# Altium PCB Layout_Power_Supply_V1.PcbDoc
Units mm, origin at the board's own origin, x right, y up, seen from the top; angles counter-clockwise.
Board outline 39.75 x 37.34 mm, 2 copper layers (Top Layer, Bottom Layer); 41 components, 27 nets, 113 pads, 26 vias.
Unrouted connection lines stored in the file: 1.
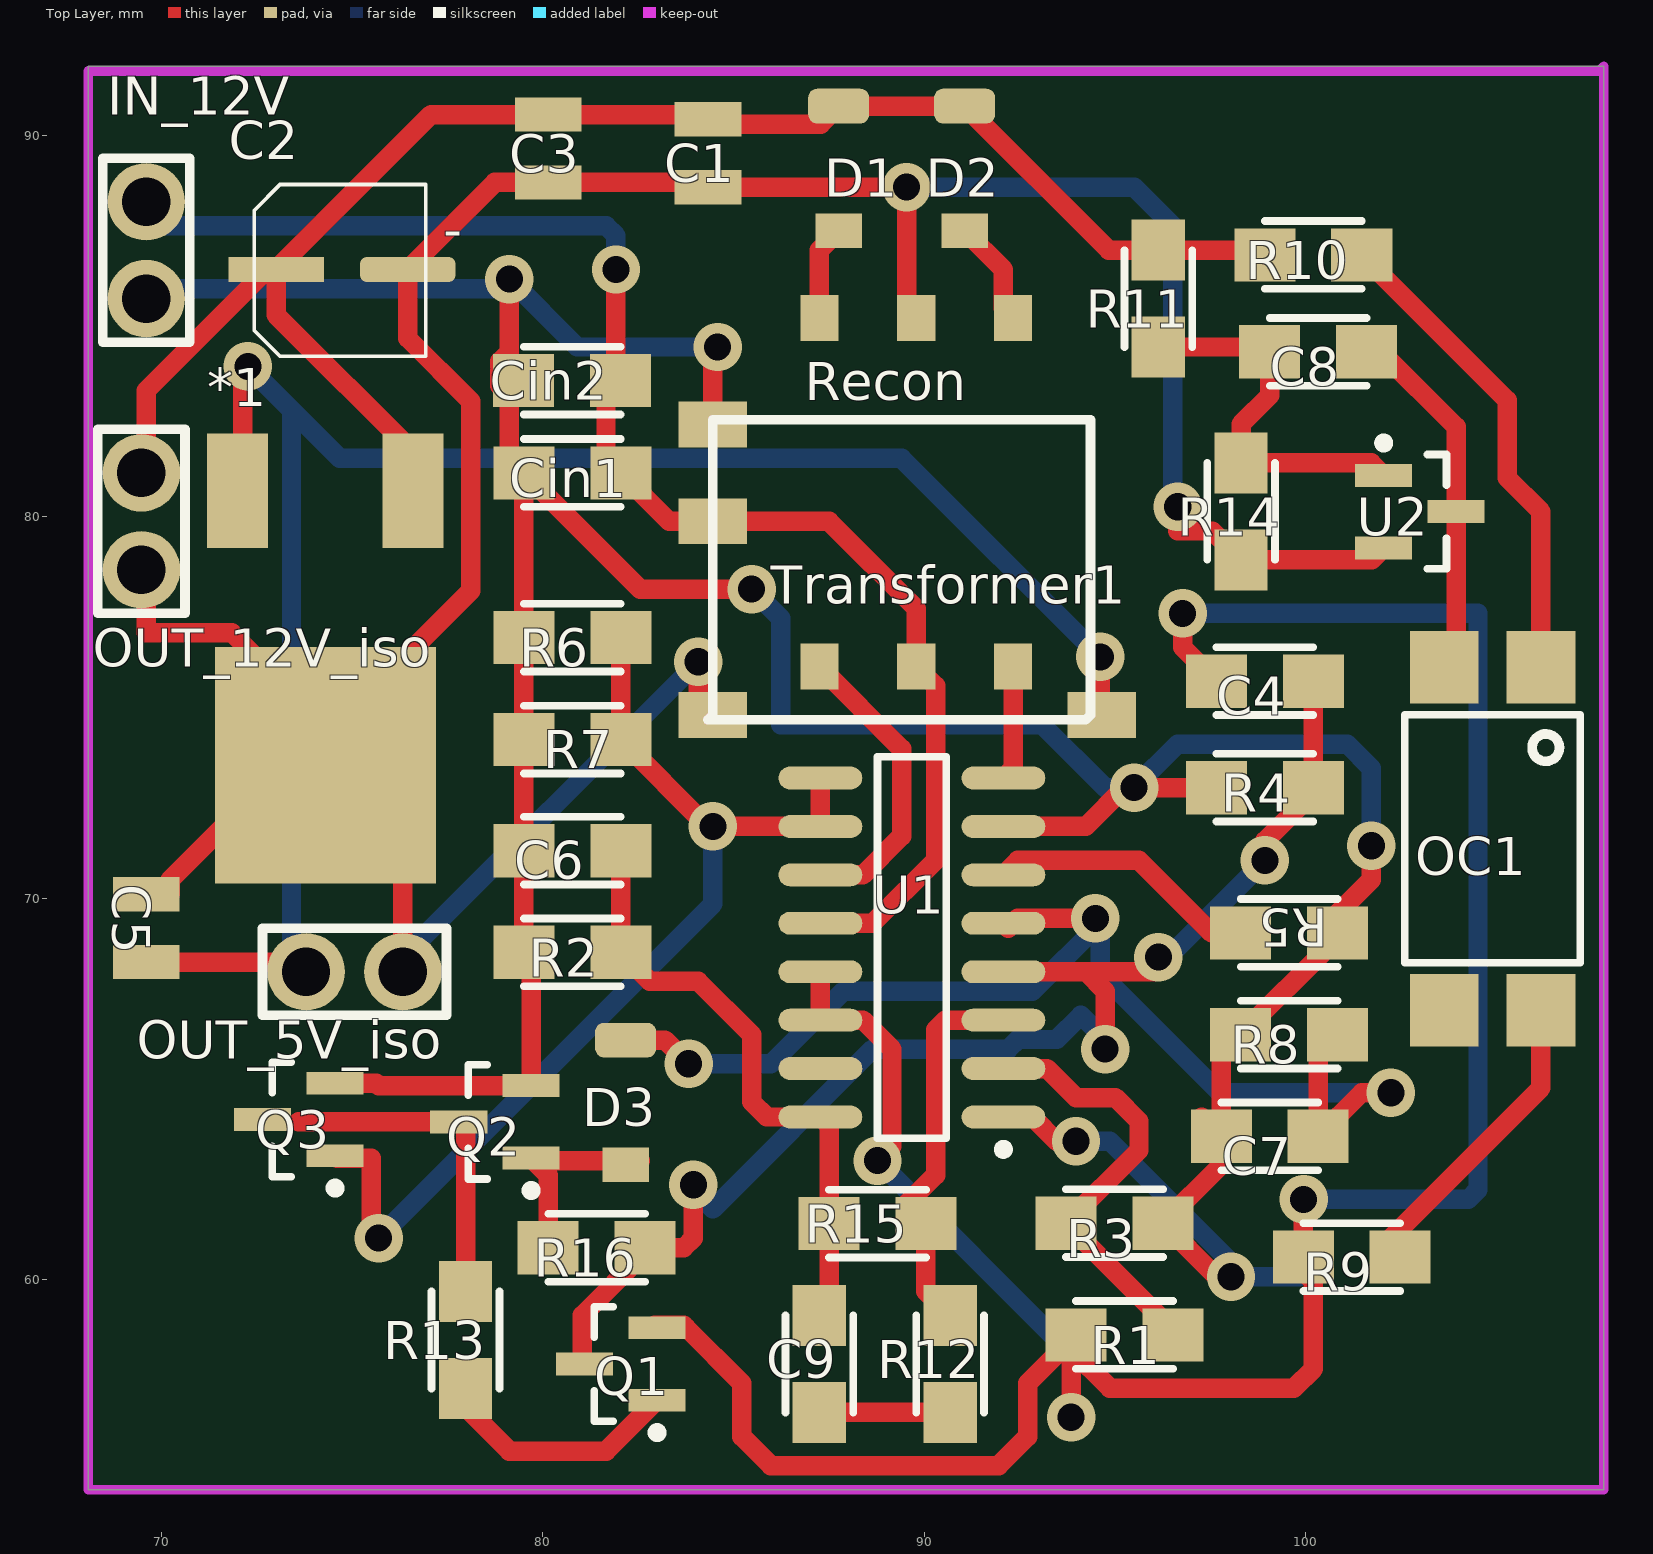
[diagram p0: Top Layer view]
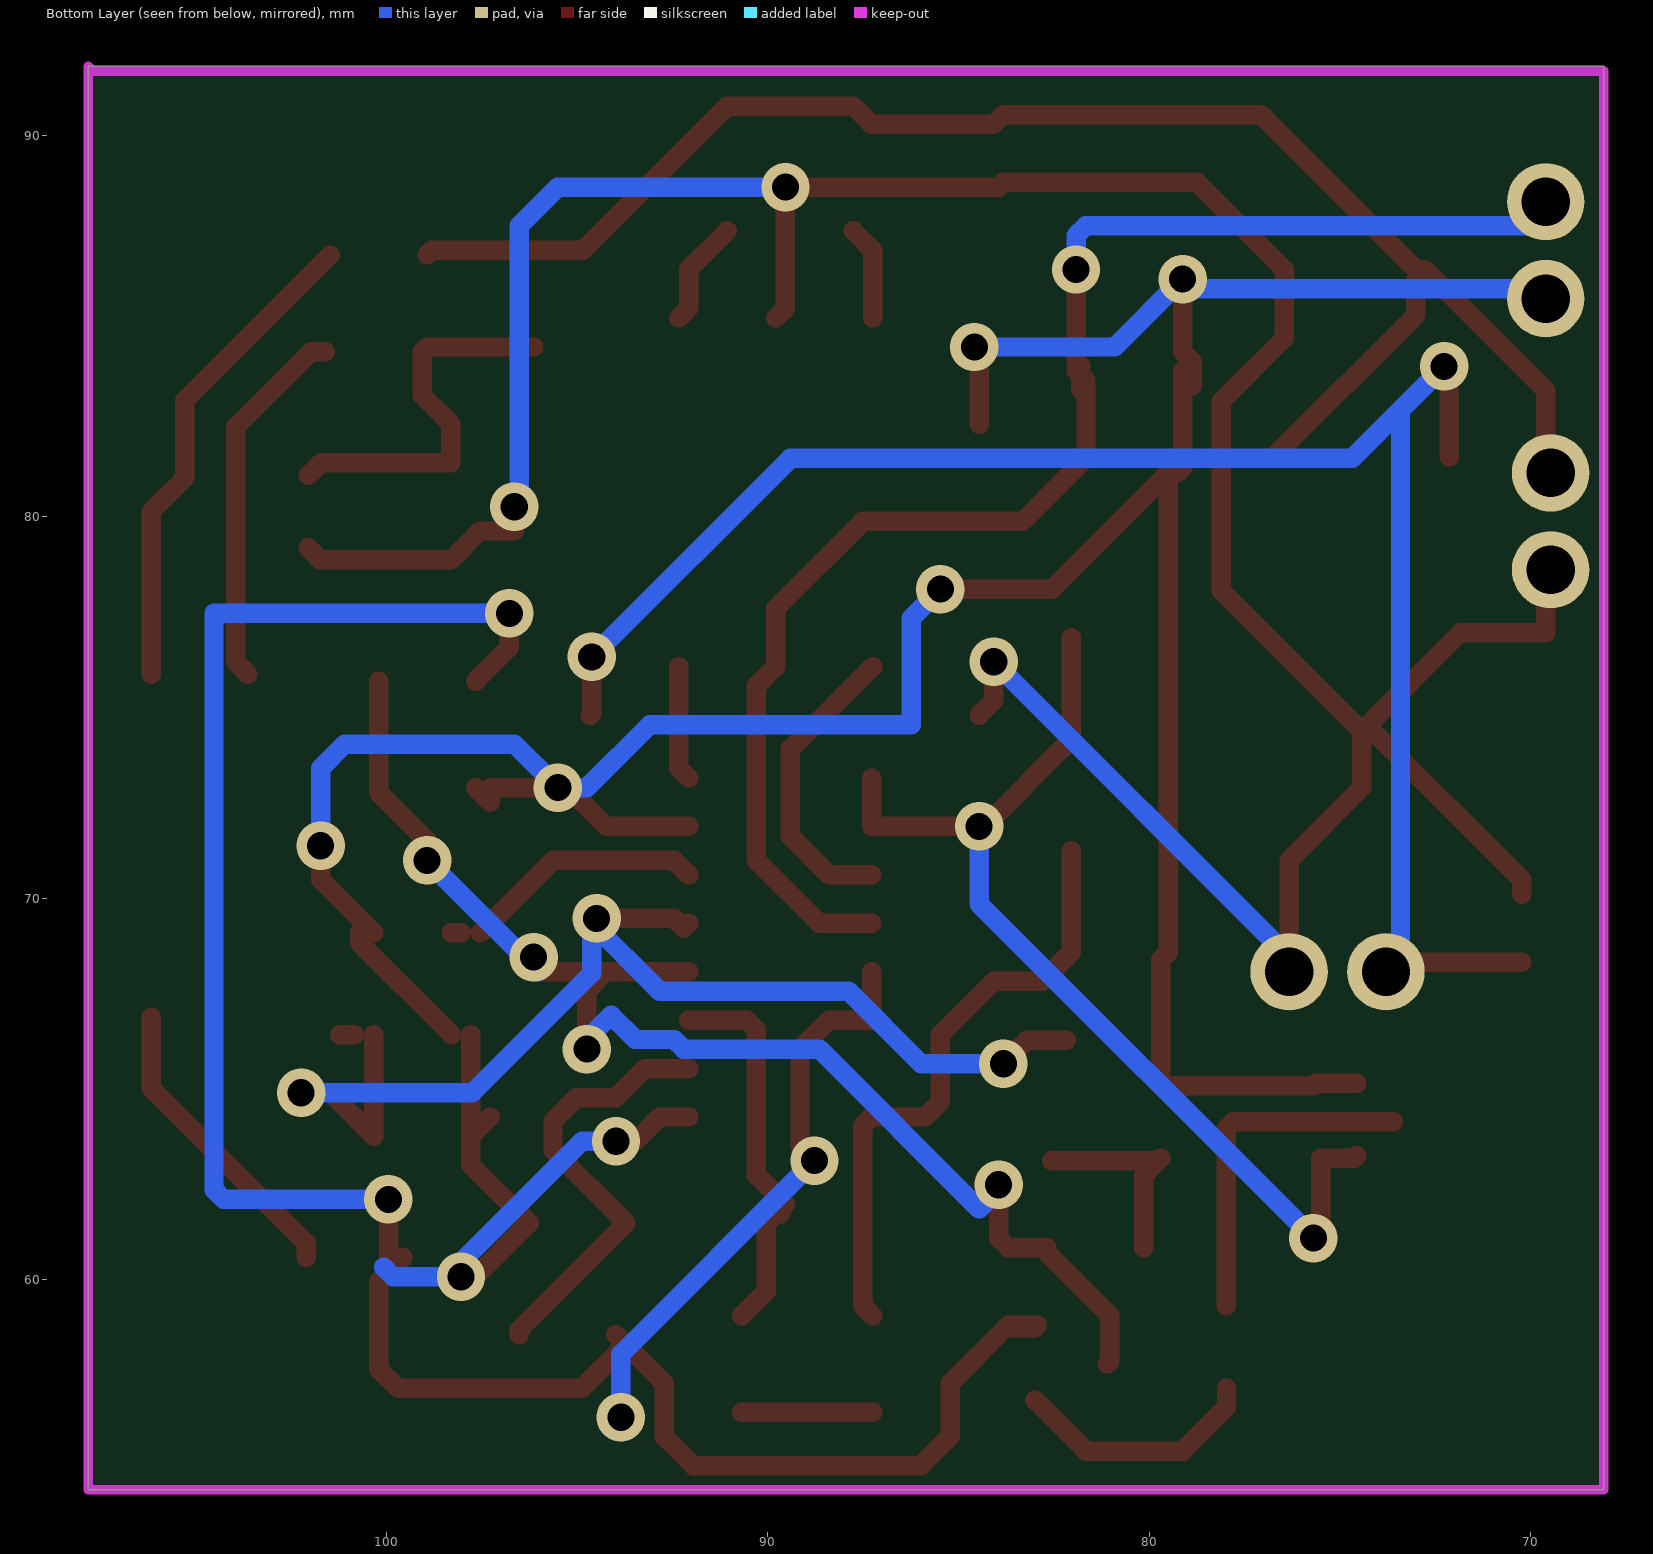
[diagram p1: Bottom Layer view, seen from below]

## Layer stack, top to bottom
Top Solder: solder mask 0.0102, Solder Resist, Dk 3.5
Top Layer: signal copper 0.0356
Dielectric 1: dielectric 0.32, FR-4, Dk 4.8
Bottom Layer: signal copper 0.0356
Bottom Solder: solder mask 0.0102, Solder Resist, Dk 3.5

## Board outline
68.072,54.483 107.823,54.483 107.823,91.821 68.072,91.821

## Design rules (kind name [scope] priority, off if disabled: settings)
Clearance [All] p1: gap=0.254
PolygonConnect [All] p1: connectstyle=Relief reliefconductorwidth=0.254 reliefentries=4 polygonreliefangle="90 Angle" airgapwidth=0.254
RoomDefinition Conectors_IsolatedSupply [InComponentClass('Conectors_IsolatedSupply')] p1: confinementstyle=ConfineIn formatcopy=TRUE lockcomponents=FALSE outline 0,0 208.915,0 208.915,149.479 0,149.479
RoomDefinition isolatedSupply [InComponentClass('isolatedSupply')] p2: confinementstyle=ConfineIn formatcopy=TRUE lockcomponents=FALSE outline 26.035,25.146 178.562,25.146 178.562,126.873 26.035,126.873
RoutingVias [All] p1: holewidth=0.711 width=1.27 viastyle="Through Hole" minholewidth=0.711 minwidth=1.27 maxholewidth=0.711 maxwidth=1.27
SolderMaskExpansion [All] p1: expansion=0.102
Width [All] p1: maxlimit=0.52 minlimit=0.5 preferedwidth=0.51 minimp=50.000000 maximp=50.000000 favimp=50.000000
30 further rules are at their usual default settings.

## Classes and differential pairs
component class Conectors_IsolatedSupply: IN_12V OUT_5V_iso OUT_12V_iso

## Components (designator, comment, footprint, x,y, rotation, side; value= is the part's Value field where it differs from the comment)
*1 "LM7805" LM7805 74.295,77.089 r90 top
C1 "Capacitor_nao_polarizado" "Capacitor SMD - 0806" 84.328,89.536 r270 top
C2 "Capacitor_polarizado" "CApacitor SMD - 22uF" 76.454,86.487 r180 top
C3 "Capacitor_nao_polarizado" "Capacitor SMD - 0806" 80.137,89.661 r270 top
C4 "Cap_0805" 0805_W 98.926,75.701 r0 top
C5 "Capacitor_nao_polarizado" "Capacitor SMD - 0806" 69.596,69.215 r90 top
C6 "Cap_0805" 0805_W 80.765,71.256 r0 top
C7 "Cap_0805" 0805_W 99.067,63.745 r180 top
C8 "Cap_0805" 0805_W 100.323,84.337 r0 top
C9 "Cap_0805" 0805_W 87.258,57.792 r270 top
Cin1 "Cap_0805" 0805_W 80.779,81.144 r180 top
Cin2 "Cap_0805" 0805_W 80.772,83.566 r180 top
D1 "B2-SMD" SOD-123 87.757,89.138 r90 top
D2 "B2-smd" SOD-123 91.059,89.138 r90 top
D3 "B2-smd" SOD-123 82.169,64.643 r90 top
IN_12V "Header 2" Header2 69.596,85.725 r90 top
OC1 "FOD-817" Opto-GullWing 104.902,71.556 r270 top
OUT_5V_iso "Header 2" Header2 76.327,68.072 r180 top
OUT_12V_iso "Header 2" Header2 69.469,78.613 r90 top
Q1 "BC857" SOT-23-TT3_N 82.042,57.785 r180 top
Q2 "BC847" SOT-23-TT3_N 78.74,64.135 r180 top
Q3 "BC847" SOT-23-TT3_N 73.599,64.196 r180 top
R1 "Res_0805" 0805_W 95.257,58.538 r180 top
R2 "Res_0805" 0805_W 80.765,68.589 r0 top
R3 "Res_0805" 0805_W 94.996,61.468 r180 top
R4 "Res_0805" 0805_W 98.926,72.907 r0 top
R5 "Res_0805" 0805_W 99.575,69.079 r180 top
R6 "Res_0805" 0805_W 80.765,76.844 r0 top
R7 "Res_0805" 0805_W 80.765,74.168 r0 top
R8 "Res_0805" 0805_W 99.561,66.43 r0 top
R9 "Res_0805" 0805_W 101.219,60.579 r180 top
R10 "Res_0805" 0805_W 100.196,86.877 r0 top
R11 "Res_0805" 0805_W 96.13,85.718 r90 top
R12 "Res_0805" 0805_W 90.687,57.792 r270 top
R13 "Res_0805" 0805_W 77.978,58.42 r270 top
R14 "Res_0805" 0805_W 98.298,80.137 r90 top
R15 "Res_0805" 0805_W 88.78,61.459 r180 top
R16 "Res_0805" 0805_W 81.4,60.842 r0 top
Transformer1 "WE-PP" Trafo 89.789,80.645 r90 top
U1 "TL494ID" SOIC16_N 89.675,68.707 r180 top
U2 "TL431" SOT-23-TT3_N 102.997,80.137 r0 top

## Footprints (in the part's own frame and the unit in brackets; to place one, negate y for a bottom-side part, rotate by r counter-clockwise, add the part's x,y. Pads: shape width x height; smd on the part's side, far side on the other; paste and mask are expansions set on the pad)
0805_W [mm]
  rect 1.6x1.397 smd: 1(-1.263,-0.009) 2(1.277,-0.009)
  silkscreen extent -1.26,-0.9 1.28,0.88
"CApacitor SMD - 22uF" [mm]
  rect 2.5x0.65 smd: 1(3.45,0)
  rrect50% 2.5x0.65 smd: 2(0,0)
  silkscreen extent -0.48,-2.23 4.03,2.27
"Capacitor SMD - 0806" [mm] "0806 - Soldar"
  rect 0.9x1.75 smd: 1(-0.89,0) 2(0.89,0)
  body extent -1.08,-0.67 1.07,0.67, height 0.55
Header2 [mil]
  round 80 hole 50: 1(0,0) 2(100,0)
  silkscreen extent -45,-45 145,45
LM7805 [mm]
  rect 6.2x5.8 smd: 1(-3.6,0)
  rect 3x1.6 smd: 2(3.6,2.3) 3(3.6,-2.3)
Opto-GullWing [mm] "SM Opto; 4 Gull Wing Leads"
  rect 1.9x1.8 smd: 1(-4.5,1.27) 2(-4.5,-1.27) 3(4.5,-1.27) 4(4.5,1.27)
  silkscreen extent -3.25,-2.3 3.25,2.3
SOD-123 [mm] "Diodo"
  rect 0.91x1.22 smd: 1(-1.635,0)
  rrect50% 0.91x1.6 smd: 2(1.635,0)
SOIC16_N [mm] "SOIC, 16-Leads, Body 9.9x3.9mm, Pitch 1.27mm, IPC Medium Density"
  oval 2.2x0.6 smd: 1(-2.4,4.445) 2(-2.4,3.175) 3(-2.4,1.905) 4(-2.4,0.635) 5(-2.4,-0.635) 6(-2.4,-1.905) 7(-2.4,-3.175) 8(-2.4,-4.445) 9(2.4,-4.445) 10(2.4,-3.175) 11(2.4,-1.905) 12(2.4,-0.635) 13(2.4,0.635) 14(2.4,1.905) 15(2.4,3.175) 16(2.4,4.445)
  silkscreen extent -2.53,-5 0.9,5.42, body extent -2,-5 2,5, height 1.91
SOT-23-TT3_N [mm] "SOT23, 3-Leads, Body 2.9x1.3mm, Pitch 0.95mm, Lead Span 2.4mm, IPC Medium Density"
  rect 1.5x0.6 smd: 1(-0.95,0.95) 2(-0.95,-0.95) 3(0.95,0)
  silkscreen extent -1.07,-1.5 0.7,1.92, body extent -0.7,-1.5 0.7,1.5, height 1.12
Trafo [mm] "transformador smd TI"
  rect 1.2x1 smd: 1(-4.57,2.54) 2(-4.57,0) 3(-4.57,-2.54) 4(4.57,-2.54) 5(4.57,0) 6(4.57,2.54)

## Part data
C1 C3 C5: "Capacitor nao polarizado"
C2: "Capacitor polarizado"
C4 C6 C7 C8 C9 Cin1 Cin2: "Capacitor"
D1 D2 D3: library part Schottky, "Diodo Schottky"
IN_12V OUT_5V_iso OUT_12V_iso: "Header, 2-Pin"
OC1: library part FOD817, "Optocoupler FOD817"
Q1: "PNP General-purpose Transistor"
Q2 Q3: "NPN General-purpose Transistor"
R1 R2 R3 R4 R5 R6 R7 R8 R9 R10 R11 R12 R13 R14 R15 R16: "Resistor"
Transformer1: library part Trafo-TI
U1: "Pulse-Width-Modulation Control Circuit"
U2: library part TL431BCLP, "Programmable Precision Reference"

## Free pads (board coordinates)
  rect 1.8x1.2 smd: 4(84.455,79.883) 5(84.455,82.423) 6(84.455,82.423) 7(84.455,74.803) 8(84.455,74.803) ""(94.655,74.803)

## Via types
v1: diameter 1.27, hole 0.711, Top Layer to Bottom Layer, 26 vias

## Nets (pads, with @x,y where several pads share a name; then routed paths per layer and width w, separated by ;. In a path a pad name is that pad's centre, name@x,y a point inside that pad or via, vN(x,y) a via of type N, cw(c..) or ccw(c..) an arc to the next point about the centre after c; other vN are vias at no path point)
5V_REF: C4.1 Q1.2 R1.2 R9.2 U1.13 U1.14 | length 75.2
  Top Layer w0.51: Q1.2@83.698,58.801 82.926,58.801 Q1.2 83.759,58.735 85.217,57.277 85.217,55.88 85.978,55.119 91.949,55.119 92.71,55.88 92.71,57.277 93.726,58.293 R1.2@93.853,58.166 ; U1.13 U1.14 88.392,66.802 89.154,66.04 89.154,63.5 v1(88.773,63.119) ; v1(93.853,56.388) R1.2@93.853,58.166 ; R1.2 93.853,58.42 R1.2@93.853,58.166 ; v1(96.774,77.47) 96.774,76.581 C4.1 ; R9.2@99.568,60.579 100.203,59.944 100.203,57.658 99.695,57.15 94.869,57.15 R1.2@93.853,58.166 ; R9.2 99.942,62.096 v1(99.949,62.103)
  Bottom Layer w0.51: v1(88.773,63.119) 93.853,58.039 v1(93.853,56.388) ; v1(96.774,77.47) 104.521,77.47 104.521,62.357 104.267,62.103 v1(99.949,62.103)
+12_ISO: 
CT: C7.1 D3.2 R8.2 U1.5 | length 32.6
  Top Layer w0.51: D3.2 83.201,66.278 v1(83.82,65.659) ; U1.5 92.202,69.215 92.456,69.469 v1(94.488,69.469) ; R8.2@100.33,66.421 C7.1 101.473,64.897 v1(102.235,64.897) ; R8.2 R8.2@101.219,66.421
  Bottom Layer w0.51: v1(83.82,65.659) 85.979,65.659 87.884,67.564 92.837,67.564 v1@94.615,69.342 ; v1(94.488,69.469) v1@94.615,69.342 ; v1(102.235,64.897) 97.75,64.897 94.615,68.032 v1@94.615,69.342
DT_CON: C4.2 Q1.3 R4.2 R16.2 U1.4 | length 35.8
  Top Layer w0.51: Q1.3 81.031,57.846 81.031,59.06 82.677,60.706 R16.2 83.693,60.833 83.947,61.087 v1(83.947,62.484) ; U1.4 94.234,68.072 ; v1(94.742,66.04) 94.742,67.564 94.234,68.072 ; v1@96.012,68.072 94.234,68.072 ; v1(98.933,70.993) 98.933,71.501 100.203,72.771 R4.2 C4.2
  Bottom Layer w0.51: v1(83.947,62.484) 83.947,62.357 84.455,61.849 88.646,66.04 92.202,66.04 92.456,66.294 93.472,66.294 94.107,66.929 94.742,66.294 v1(94.742,66.04) ; v1@96.012,68.072 v1(98.933,70.993)
  other v1: 96.139,68.453
FEEDBACK: R12.1 R15.1 U1.3 | length 10.1
  Top Layer w0.51: R15.1@89.535,61.976 90.297,62.738 90.297,66.548 90.551,66.802 U1.3 ; R15.1@89.662,61.722 89.662,61.849 R15.1 90.043,59.69 R12.1
GND_IN: C6.1 C7.2 Cin1.2 Cin2.2 IN_12V.1 pad.5 pad.6 Q2.2 Q3.2 R2.1 R3.1 R4.1 R5.1 R6.1 R7.1 R8.1 U1.1 U1.7 | length 107.1
  Top Layer w0.51: Q3.2 75.631,65.146 75.692,65.085 Q2.2 79.69,68.392 R2.1 C6.1 R7.1 R6.1 Cin1.2 82.55,78.105 v1(85.471,78.105) ; Cin2.2@78.867,83.442 Cin2.2@78.867,83.823 ; Cin2.2@78.867,83.95 Cin2.2@78.867,84.077 ; v1(79.121,86.233) 79.121,84.331 Cin2.2@78.867,84.077 ; Cin1.2@79.248,81.153 79.114,81.287 79.114,83.829 Cin2.2@78.867,84.077 ; pad.5 84.455,84.328 v1(84.582,84.455) ; U1.1 92.837,64.262 93.472,63.627 v1(93.98,63.627) ; U1.7 94.234,71.882 95.25,72.898 v1(95.504,72.898) 97.282,72.898 97.282,72.517 R4.1 ; C7.2@97.282,64.262 C7.2 ; R8.1@97.79,66.421 C7.2 ; v1(98.044,60.071) 97.666,60.071 R3.1 97.79,63.008 C7.2 ; R8.1 100.704,68.827 R5.1@100.704,69.088 ; R5.1@100.33,69.088 101.727,70.485 v1(101.727,71.374)
  Bottom Layer w0.51: IN_12V.1@69.469,85.979 78.867,85.979 v1(79.121,86.233) 80.899,84.455 v1(84.582,84.455) ; v1(85.471,78.105) 86.233,77.343 86.233,74.549 93.091,74.549 94.742,72.898 v1(95.504,72.898) 96.647,74.041 101.092,74.041 101.727,73.406 v1(101.727,71.374) ; v1(93.98,63.627) 94.869,63.627 98.044,60.452 v1(98.044,60.071) 99.822,60.071 100.076,60.325
GND_ISO: *1.1 C1.2 C2.2 C3.2 C5.2 OUT_5V_iso.1 OUT_12V_iso.1 pad.7 pad.8 R14.1 Transformer1.5 U2.2 | length 87.2
  Top Layer w0.51: OUT_12V_iso.1@69.596,78.613 69.596,76.962 71.838,76.962 *1.1@74.378,74.422 ; C5.2@70.231,70.105 70.231,70.485 74.124,74.378 74.422,74.378 *1.1@74.378,74.422 ; *1.1@74.422,74.296 74.422,72.898 76.327,70.993 OUT_5V_iso.1 OUT_5V_iso.1@76.327,67.945 ; v1(84.074,76.2) 84.074,75.184 pad.7 ; Transformer1.5 89.535,85.469 v1(89.535,88.646) C1.2 83.947,88.646 83.82,88.773 80.139,88.773 C3.2 78.738,88.771 C2.2 76.454,84.685 78.105,83.034 78.105,78.061 74.466,74.422 *1.1@74.378,74.422 ; v1(96.647,80.264) 96.647,79.629 97.552,79.629 R14.1 101.734,78.874 U2.2
  Bottom Layer w0.51: OUT_5V_iso.1@76.327,67.945 OUT_5V_iso.1 76.327,68.453 v1(84.074,76.2) ; v1(89.535,88.646) 95.504,88.646 96.52,87.63 96.52,80.391 v1(96.647,80.264)
I_FB: Q3.1 R6.2 R7.2 U1.9 U1.10 | length 27.7
  Top Layer w0.51: Q3.1 74.61,63.185 75.499,63.185 75.499,61.28 v1(75.692,61.087) ; R6.2 R7.2 84.319,71.882 v1(84.455,71.882) U1.10 U1.9
  Bottom Layer w0.51: v1(75.692,61.087) 84.455,69.85 v1(84.455,71.882)
Net*1_2: *1.2 C5.1 OUT_5V_iso.2 pad. | length 48.2
  Top Layer w0.51: C5.1@70.231,68.325 73.407,68.325 OUT_5V_iso.2@73.787,67.945 ; *1.2@72.122,81.578 72.122,83.806 v1(72.263,83.947) ; v1(94.615,76.327) 94.615,74.843 pad.
  Bottom Layer w0.51: v1(72.263,83.947) 73.406,82.804 ; OUT_5V_iso.2@73.787,67.945 OUT_5V_iso.2 73.406,68.453 73.406,82.804 ; v1(94.615,76.327) 89.408,81.534 74.676,81.534 73.406,82.804
NetC8_1: C8.1 R11.1 R14.2 U2.1 | length 10.1
  Top Layer w0.51: R11.1 98.933,84.455 C8.1 99.06,83.185 98.307,82.432 R14.2 101.72,81.414 U2.1
NetC8_2: C8.2 OC1.2 U2.3 | length 9.8
  Top Layer w0.51: C8.2 101.981,84.328 103.947,82.362 U2.3 103.947,76.189 OC1.2@103.632,75.874
NetC9_2: C9.2 R12.2 | length 3.4
  Top Layer w0.51: C9.2 R12.2
NetD1_1: D1.1 Transformer1.6 | length 2.5
  Top Layer w0.51: Transformer1.6 87.249,86.995 D1.1
NetD2_1: D2.1 Transformer1.4 | length 2.8
  Top Layer w0.51: D2.1 92.075,86.487 92.075,85.469 Transformer1.4
NetD3_1: D3.1 Q2.1 R16.1 | length 5.3
  Top Layer w0.51: Q2.1 Q2.1@79.756,63.119 ; R16.1 80.137,62.738 Q2.1@79.756,63.119 ; D3.1@82.55,63.119 Q2.1@79.756,63.119
NetOC1_1: OC1.1 R10.2 | length 12.9
  Top Layer w0.51: R10.2 105.283,83.058 105.283,81.026 106.172,80.137 OC1.1 OC1.1@106.172,75.874
NetOC1_4: OC1.4 R9.1 | length 8
  Top Layer w0.51: R9.1@102.108,60.579 102.108,60.96 106.172,65.024 OC1.4@106.172,66.874
NetQ1_1: Q1.1 R13.2 | length 6.5
  Top Layer w0.51: R13.2 77.969,56.651 79.121,55.499 81.656,55.499 Q1.1
NetQ2_3: Q2.3 Q3.3 R13.1 | length 9.1
  Top Layer w0.51: 73.599,64.135 Q2.3 77.978,63.947 R13.1@77.978,59.309
NetR5_2: R5.2 U1.6 | length 6.7
  Top Layer w0.51: U1.6 92.456,70.993 95.631,70.993 R5.2@97.536,69.088 ; R5.2@98.044,69.088 R5.2
NetTransformer1_1: Transformer1.1 U1.11 | length 7.9
  Top Layer w0.51: Transformer1.1 89.408,73.916 89.408,71.628 88.392,70.612 U1.11
NetTransformer1_3: Transformer1.3 U1.8 | length 3
  Top Layer w0.51: U1.8 92.329,73.406 Transformer1.3
V_FEEDBACK: OC1.3
V_OUT_FB: C6.2 C9.1 R2.2 R15.2 U1.16 | length 16.1
  Top Layer w0.51: C6.2 R2.2 82.804,67.818 84.074,67.818 85.471,66.421 85.471,64.662 85.871,64.262 U1.16 87.503,64.034 R15.2 87.503,59.309 C9.1
VIN: Cin1.1 Cin2.1 IN_12V.2 pad.4 Transformer1.2 U1.12 | length 39.7
  Top Layer w0.51: Cin2.1@81.788,83.328 Cin2.1@81.788,83.709 ; v1(81.915,86.487) 81.915,84.09 81.788,83.963 81.915,83.836 Cin2.1@81.788,83.709 ; U1.12 88.646,69.342 90.297,70.993 90.297,75.567 Transformer1.2 89.789,77.597 87.503,79.883 pad.4 83.312,79.883 Cin1.1 81.654,81.541 81.654,83.575 Cin2.1@81.788,83.709
  Bottom Layer w0.51: IN_12V.2@69.342,88.265 69.977,87.63 81.661,87.63 81.915,87.376 v1(81.915,86.487)
VOUT: *1.3 C1.1 C2.1 C3.1 D1.2 D2.2 OUT_12V_iso.2 R10.1 R11.2 | length 42.4
  Top Layer w0.51: OUT_12V_iso.2@69.921,81.661 69.596,81.661 69.596,83.312 72.771,86.487 C2.1 77.068,90.551 C3.1 83.822,90.551 84.076,90.297 87.281,90.297 D1.2 D2.2 94.837,86.995 R11.2 98.806,86.995 R10.1 ; C2.1@73.004,86.212 73.004,85.296 *1.3@76.722,81.578
VREF: R1.1 R3.2 U1.2 U1.15 | length 11.7
  Top Layer w0.51: U1.2 93.218,65.532 93.979,64.771 95.011,64.771 95.631,64.151 95.631,63.389 R3.2 96.52,58.677 R1.1

## Keep-outs
Keep-Out Layer:
  lines w0.254: 68.072,54.483 68.072,91.694 107.696,91.694 107.823,91.821 107.823,54.483 68.072,54.483

## Silkscreen, mask and mechanical layers (free items; w line width, h text height)
Top Overlay:
  lines w0.254: 84.328,74.676 94.234,74.676 94.361,74.803 94.361,82.55 84.455,82.55 84.455,74.803 84.328,74.676
  text "Recon" at 86.868,83.058 h1

## Text inside footprints (layer, text, board x,y; h text height)
C2: Top Overlay "-" at 77.879,87.787 h1 r180